# Altium PCB Power_Converter.PcbDoc
Units mil, origin at the board's own origin, x right, y up, seen from the top; angles counter-clockwise.
Board outline 3100 x 2215 mil, 2 copper layers (Top Layer, Bottom Layer), stack 21 mil thick; 23 components, 10 nets, 55 pads, 7 vias.
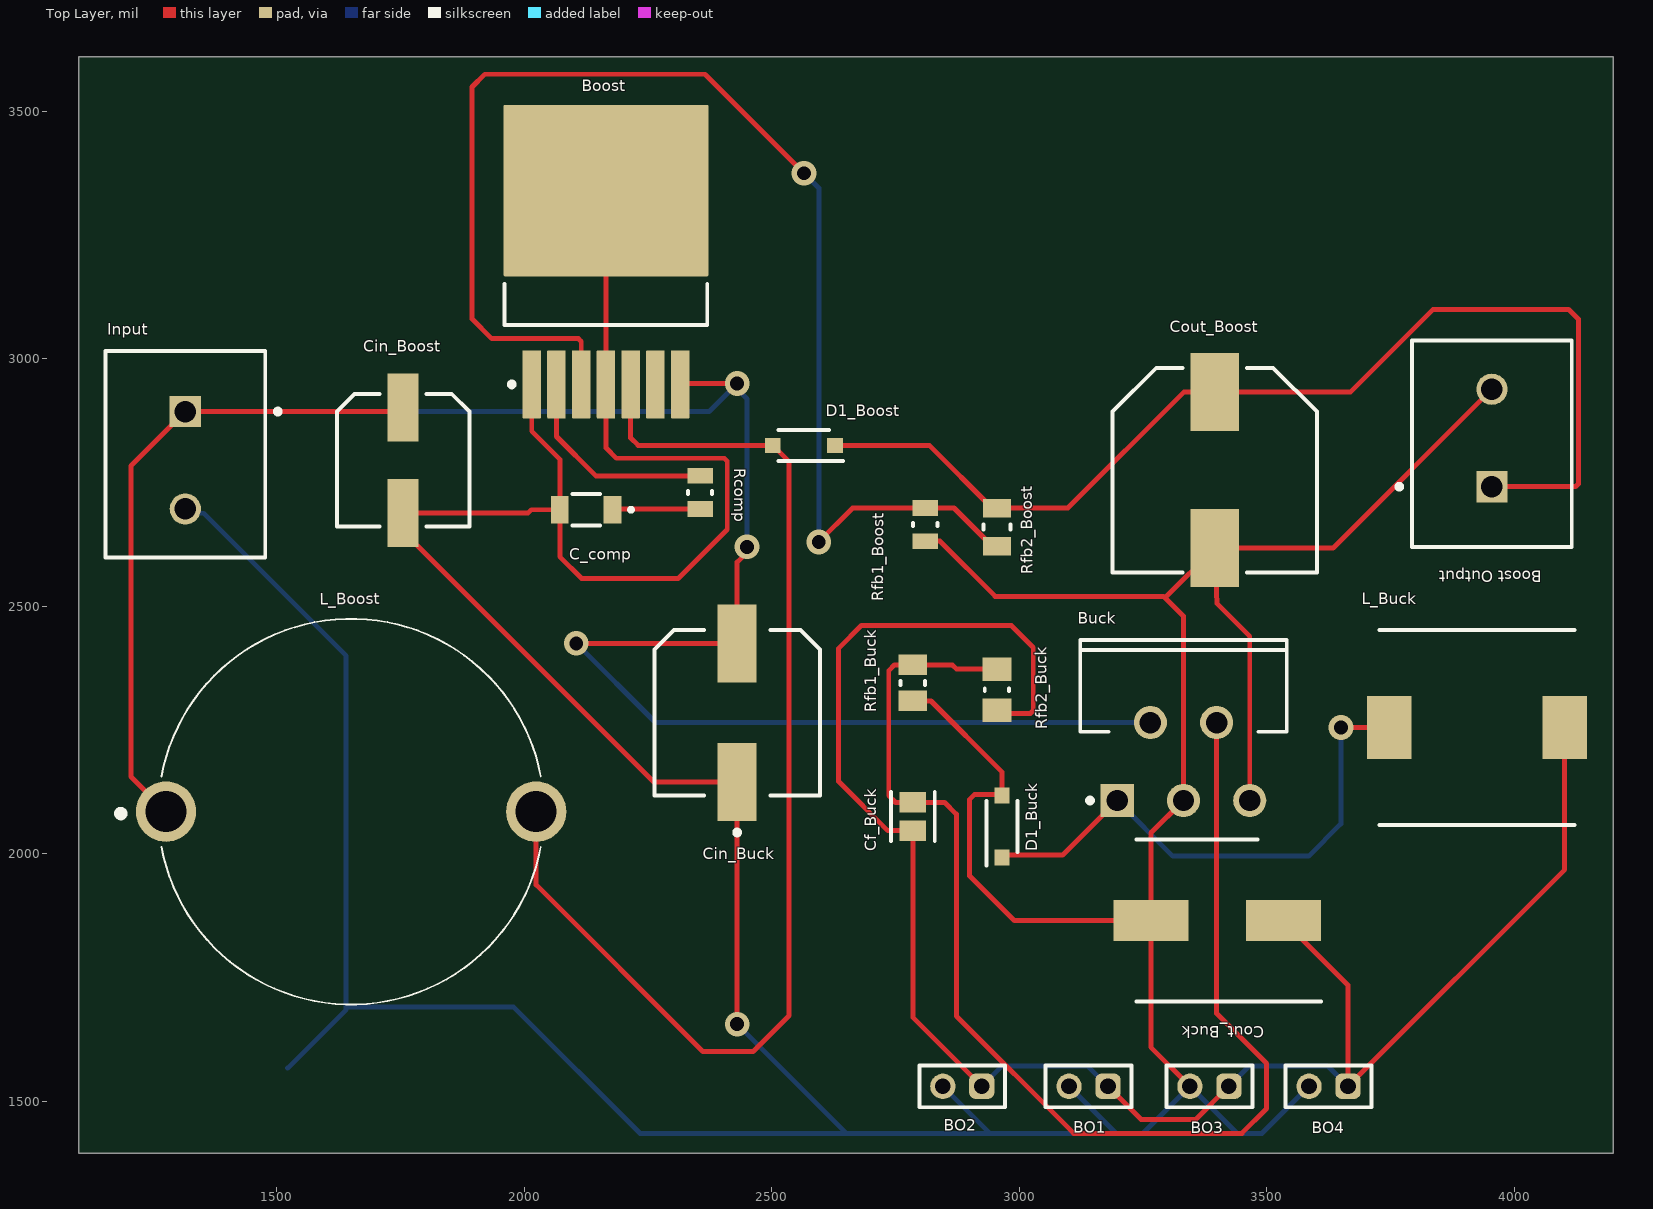
[diagram p0: Top Layer view]
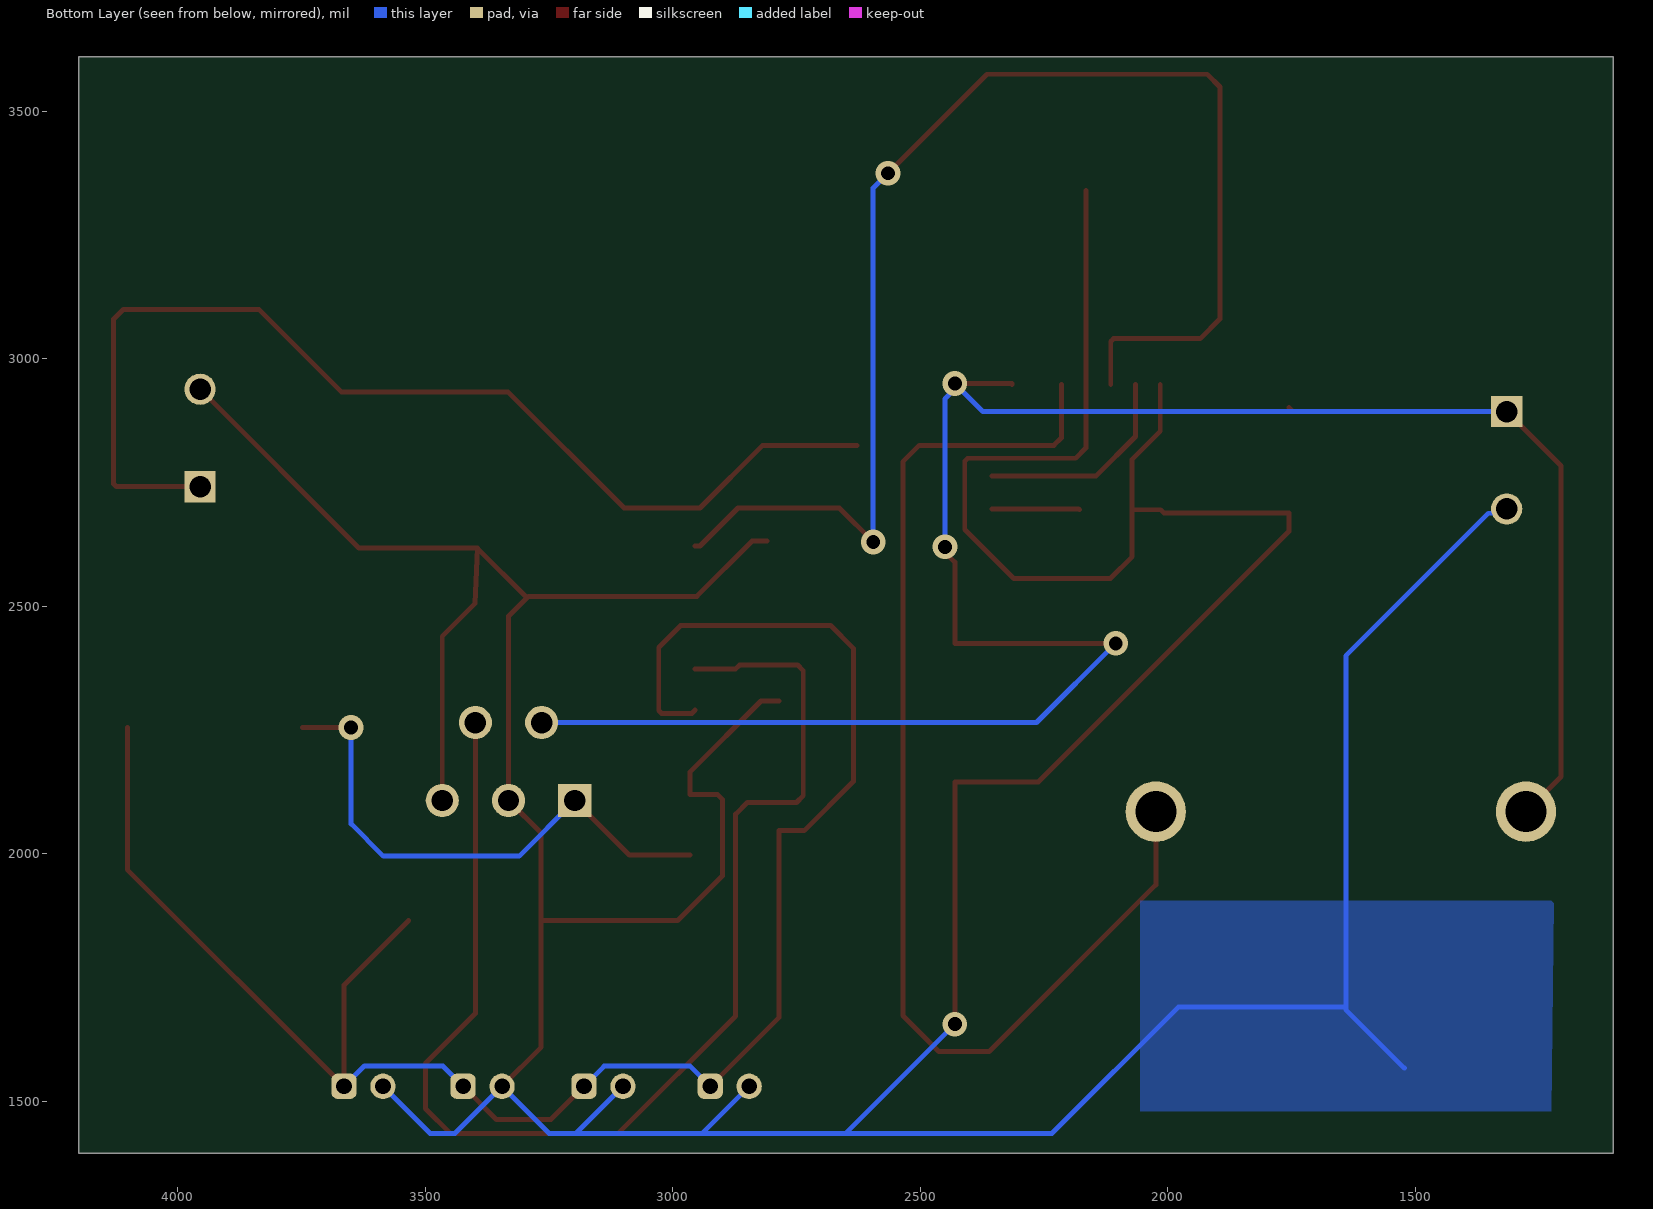
[diagram p1: Bottom Layer view, seen from below]
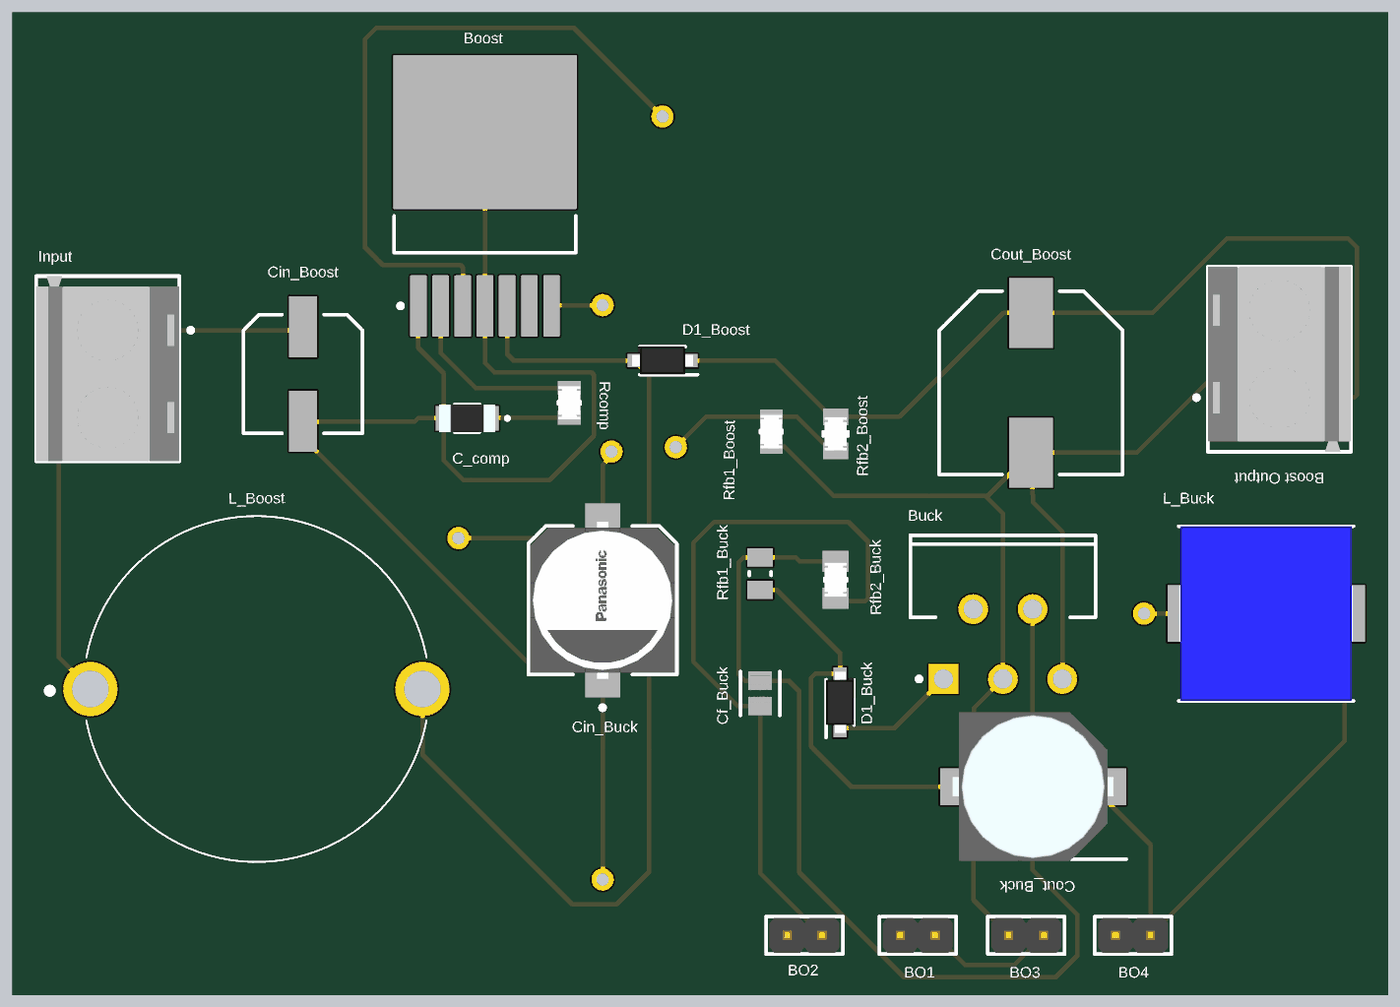
[diagram p2: 3D render of the assembled board from above, using the file's embedded part models]

## Layer stack, top to bottom
Top Solder: solder mask 0.4, Solder Resist, Dk 3.5
Top Layer: signal copper 1.4
Dielectric 2: prepreg 2.8, PP-006, Dk 4.1
Dielectric 1: dielectric 12.6, FR-4, Dk 4.8
Dielectric 3: prepreg 2.8, PP-006, Dk 4.1
Bottom Layer: signal copper 1.4
Bottom Solder: solder mask 0.4, Solder Resist, Dk 3.5

## Board outline
1100,1395 4200,1395 4200,3610 1100,3610

## Design rules (kind name [scope] priority, off if disabled: settings)
Clearance [All] p1: gap=10 ignorepadtopadclearanceinfootprint=FALSE except(0: Arc-Hole Track-Hole SMDPad-Hole THPad-Hole Via-Hole Fill-Hole Poly-Hole Region-Hole Text-Hole)
PolygonConnect [All] p1: connectstyle=Relief reliefconductorwidth=10 reliefentries=4 polygonreliefangle="90 Angle" airgapwidth=10
RoutingVias [All] p1: holewidth=28 width=50 viastyle="Through Hole" minholewidth=28 minwidth=50 maxholewidth=28 maxwidth=50
SolderMaskExpansion [All] p1: expansion=4 istentingtop=FALSE
Width [All] p1: maxlimit=10 minlimit=10 preferedwidth=10
30 further rules are at their usual default settings.

## Classes and differential pairs
component class "Power_Converter Circuit": r

## Components (designator, comment, footprint, x,y, rotation, side; value= is the part's Value field where it differs from the comment)
BO1 "62000211121" 62000211121 3140,1530 r180 top
BO2 "62000211121" 62000211121 2885,1530 r180 top
BO3 "62000211121" 62000211121 3384.37,1530 r180 top
BO4 "62000211121" 62000211121 3625,1530 r180 top
Boost "LM2588S-ADJ/NOPB" KTW0007B_N 2165,3196.3 r90 top
"Boost Output" "282836-2" TECO-282836-2_V 3955,2840 r90 top
Buck "" NDH0005A 3331.93,2186.26 r0 top
C_comp "ECPU1C474MA5" ECPU1C154MA5 2125,2695 r180 top (schematic designator Ccomp_Boost)
Cf_Buck "CL21C222JBFNNNE" FP-CL21-IPC_C 2785,2075 r270 top
Cin_Boost "UUD1V680MCL1GS" NIC-CAPA2-6.3X7.7_V 1755,2795 r270 top
Cin_Buck "EEE-FK1H101GP" FP-FKF-MFG 2430,2285 r90 top
Cout_Boost "UUD1H221MNL1GS" NIC-CAPA2-10X10_V 3395,2775 r270 top
Cout_Buck "EMVH100ADA221MHA0G" CAPAE830X1050N 3400,1865 r180 top
D1_Boost "PMEG6010CEH,115" SODFL3516X120N 2565,2825 r180 top
D1_Buck "PMEG6010CEH,115" SODFL3516X120N 2965,2055 r90 top
Input "282836-2" TECO-282836-2_V 1315,2795 r270 top
L_Boost "1447440C" 1447440C 1650,2085 r0 top
L_Buck "SRU1048-331Y" INDPM100100X510N 3925,2255 r0 top
Rcomp "CRCW08052K37FKEA" FP-CRCW0805-e3-IPC_C 2355,2730 r270 top (schematic designator Rcomp_Boost)
Rfb1_Boost "CRCW08051K50FKEB" FP-CRCW0805-e3-IPC_C 2810,2665 r270 top
Rfb1_Buck "CRCW08051K00FKEA" RESC2013X50X30NL20T20 2785,2345 r90 top
Rfb2_Boost "CRCW080538K3FKEB" FP-CRCW0805-e3-MFG 2955,2660 r90 top
Rfb2_Buck "CRCW08051K69FKEA" FP-CRCW0805-e3-IPC_A 2955,2331.37 r270 top

## Footprints (in the part's own frame and the unit in brackets; to place one, negate y for a bottom-side part, rotate by r counter-clockwise, add the part's x,y. Pads: shape width x height; smd on the part's side, far side on the other; paste and mask are expansions set on the pad)
1447440C [mm]
  round 3.1 hole 2.1: 1(-9.5,0) 2(9.5,0)
  silkscreen extent -11.96,-9.9 9.73,9.9
62000211121 [mm] "Pin Header, pitch 2.00 mm, THT, Vertical, single row, 2p"
  rrect50% 1.3x1.3 hole 0.8: 1(-1,0)
  round 1.3 hole 0.8: 2(1,0)
  silkscreen extent -2.2,-1.07 2.2,1.07, body extent -2,-1 2,1, height 6.05
CAPAE830X1050N [mm]
  rect 3.85x2.1 smd: 1(-3.4,0) 2(3.4,0)
  silkscreen extent -5.33,-4.15 4.15,4.15, body extent -4.6,-4.25 4.6,4.25, height 10.5
ECPU1C154MA5 [mm]
  rect 0.9x1.4 smd: 1(-1.35,0) 2(1.35,0)
  silkscreen extent -2.4,-0.8 0.7,0.8, body extent -1.6,-0.8 1.6,0.8, height 1.4
FP-CL21-IPC_C [mil]
  rect 41.52x53.39 smd paste+0 mask+0: 1(-28.57,0) 2(28.57,0)
  silkscreen extent -49,-44 49,44, body extent -53,-32 53,32, height 10
FP-CRCW0805-e3-IPC_A [mil]
  rect 47.5x59.38 smd paste+0 mask+0: 1(-41.37,0) 2(41.37,0)
  silkscreen extent -3,-25 3,25, body extent -85,-49 85,49, height 10
FP-CRCW0805-e3-IPC_C [mil]
  rect 31.75x51.5 smd paste+0 mask+0: 1(-33.5,0) 2(33.5,0)
  silkscreen extent -3,-25 3,25, body extent -53,-31 53,31, height 10
FP-CRCW0805-e3-MFG [mm]
  rect 0.95x1.45 smd paste+0 mask+0: 1(-0.975,0) 2(0.975,0)
  silkscreen extent -0.13,-0.7 0.13,0.7, body extent -1.55,-0.82 1.55,0.82, height 0.25
FP-FKF-MFG [mm]
  rect 4x2 smd paste+0 mask+0: 1(-3.55,0) 2(3.55,0)
  silkscreen extent -6.27,-4.25 4.25,4.25, body extent -5.8,-4.5 5.8,4.5, height 0.25
INDPM100100X510N [mm]
  rect 2.3x3.25 smd: 1(-4.5,0) 2(4.5,0)
  silkscreen extent -5,-5 5,5, body extent -5,-5 5,5, height 5.1
KTW0007B_N [mm] "DPAK, 7-Leads, Body 9.4x10.4mm, Pitch 1.27mm, IPC Medium Density"
  rrect11% 3.5x0.95 smd: 1(-6.3,3.81) 2(-6.3,2.54) 3(-6.3,1.27) 4(-6.3,0) 5(-6.3,-1.27) 6(-6.3,-2.54) 7(-6.3,-3.81)
  rrect1% 8.8x10.5 smd: 8(3.65,0)
  silkscreen extent -6.42,-5.2 -1.15,5.2, body extent -3.25,-5.2 6.15,5.2, height 4.65
NDH0005A [mm] "FM, 5-Leads, Body 10.6x4.7mm, Pitch 1.7mm"
  rect 1.7x1.7 hole 1.1: 1(-3.4,-2)
  round 1.7 hole 1.1: 2(-1.7,2) 3(0,-2) 4(1.7,2) 5(3.4,-2)
  silkscreen extent -5.3,-2.12 5.3,6.23, body extent -5.35,-2.31 5.35,6.28, height 21.1
NIC-CAPA2-6.3X7.7_V [mm] "Aluminum Electrolytic Capacitor, Diameter 6.3mm, Height 8mm, Pitch 5.4mm"
  rect 3.5x1.6 smd: 1(-2.7,0) 2(2.7,0)
  silkscreen extent -3.4,-3.4 3.4,3.4, body extent -3.14,-3.12 3.14,3.15, height 8
NIC-CAPA2-10X10_V [mm] "Aluminum Electrolytic Capacitor, Diameter 10mm, Height 10.8mm, Pitch 8mm"
  rect 4x2.5 smd: 1(-4,0) 2(4,0)
  silkscreen extent -5.25,-5.25 5.25,5.25, body extent -4.96,-4.99 5,4.99, height 10.8
RESC2013X50X30NL20T20 [mm] "Chip Resistor, 2-Leads, Body 2.00x1.25mm, IPC Medium Density"
  rect 1.05x1.45 smd: 1(-0.925,0) 2(0.925,0)
  silkscreen extent -0.1,-0.62 0.1,0.62, body extent -1.1,-0.72 1.1,0.72, height 0.5
SODFL3516X120N [mm]
  rect 0.82x0.76 smd: 1(-1.6,0) 2(1.6,0)
  silkscreen extent -2.01,-0.8 1.3,0.8, body extent -1.75,-0.8 1.75,0.8, height 1.1
TECO-282836-2_V [mm] "Female Header, Pitch 5mm, 1 x 2 Position, Height 10mm"
  rect 1.6x1.6 hole 1.1: 1(-2.5,0)
  round 1.6 hole 1.1: 2(2.5,0)
  silkscreen extent -5.6,-4.1 5,4.87, body extent -5.6,-4.1 5,4.1, height 10

## Part data
BO1 BO2 BO3 BO4: library part CMP-1502-00956-3, Contact Resistance=20mΩ, Current Rating=2A, Max Operating Temperature=105°C, Min Operating Temperature=-40°C, Operating Supply Voltage=200V, Contact Material=Gold, Gender=Male, Height=6.35mm, Lead Pitch=2mm, NexarPartId=61924778, Number of Contacts=2, Number of Pins=2, Number of Rows=1, Orientation=Vertical, RoHS=Non-Compliant, Voltage Rating=200V
Boost: library part CMP-0069-00054-3, "SIMPLE SWITCHER® 5A Flyback Regulator with Shutdown, 7-pin TO-263, Pb-Free", Manufacturer="Texas Instruments", PackageTopMarking="NSUZXYTTE#*LM2588S*-ADJ P+", PowerWise=N, Code_JEDEC=MO-169-AC, ComponentLink1Description="Datasheet URL", ComponentLink1URL=http://www.ti.com/general/docs/lit/getliterature.tsp?genericPartNumber=LM2588&fileType=pdf, CompType=Switcher, PackageDescription="TO-263, Molded, .400 x .390 x .180in Body, 7 Lead, .050in Pitch, Surface Mount", PackageReference=KTW0007B, PinCount=7, RoHS=Y
"Boost Output" Input: library part CMP-1684-00017-1, "Female Header, Pitch 5 mm, 1 x 2 Position, Height 10 mm, Tail Length 3.5 mm, Rohs, Bulk", Color=Green, Current=13.5A, Manufacturer="TE Connectivity", Package Description="Female Header, Pitch 5 mm, 1 x 2 Position, Height 10 mm, Tail Length 3.5 mm", Package Reference=THD, Standard Package=300, Voltage=300V, 3D Model=282836-2.pdf, Category=Connectors,Interconnects, Clamp Material - Plating=Brass-NickelPlated, Contact Material - Plating=Brass-TinPlated, Datasheet URL=http://www.te.com.cn/commerce/DocumentDelivery/DDEController?Action=showdoc&DocId=Catalog+Section%7F1308389_EUROSTYLE_TERMINAL_BLOCKS%7F0607%7Fpdf%7FEnglish%7FENG_CS_1308389_EUROSTYLE_TERMINAL_BLOCKS_0607.pdf%7F282836-2, Dynamic Catalog=BuchananSeries, Family=TerminalBlocks-WiretoBoard, Featured Product=EurostyleTerminalBlockConnectors, Features=Interlocking(Side), Housing Material=Polyamide(PA66),Nylon6/6, Manufacturer URL=http://www.te.com, Mating Orientation=HorizontalwithBoard, Mounting Type=ThroughHole, Number of Levels=1, Other Names="5ULV-02B / A98076", Packaging=Bulk, Pitch="0.197\"(5.00mm)", Positions Per Level=2, Product Training Modules=Wire-to-BoardEurostyleTerminalBlocks, RoHS Information=282836-2StatementofCompliance, Screw Material - Plating=Brass-NickelPlated, Screw Thread=M3, Series=Buchanan, Torque - Screw=0.68Nm(6Lb-In), Wire Gauge=16-30AWG, Wire Termination=Screw-RisingCageClamp
Buck: library part CMP-0069-01920-3, "SIMPLE SWITCHER® Power Converter 150 KHz 1A Step-Down Voltage Regulator, 5-pin TO-220, Pb-Free", Manufacturer="Texas Instruments", PackageTopMarking="NSUZXYTTE#*LM2595T*-ADJ P+", PowerWise=N, ComponentLink1Description="Datasheet URL", ComponentLink1URL=http://www.ti.com/general/docs/lit/getliterature.tsp?genericPartNumber=LM2595&fileType=pdf, CompType=Switcher, PackageDescription="TO-220, Molded, Stagger Bend, 5 Lead", PackageReference=NDH0005A, PinCount=5, RoHS=Y
C_comp: "Capacitor", Manufacturer_Name=Panasonic, Datasheet Link=http://industrial.panasonic.com/cdbs/www-data/pdf/RDI0000/ABD0000C178.pdf, Manufacturer_Part_Number=ECPU1C474MA5
Cf_Buck: library part CMP-13271-001564-1, "CL21 Series 0805 2.2nF 50V ±5% Tolerance C0G Multilayer Ceramic Chip Capacitor", Capacitance=2.2nF, Case Code (Imperial)=0805, Case Code (Metric)=2012, Dielectric=C0G, Max Operating Temperature=125°C, Min Operating Temperature=-55°C, Package Quantity=2000, Tolerance=5%, Voltage=50V, Case/Package=0805, Depth=1.25mm, Height=1.25mm, Lead Free="Lead Free", Length=2mm, Mount="Surface Mount", Packaging="Tape and Reel", Radiation Hardening=No, Thickness=0.053inch, Voltage Rating=50V, Voltage Rating (DC)=50V, Width=0.049inch
Cin_Boost: library part CMP-0687-00064-1, "Aluminum Electrolytic Capacitor, UD Series, Low Impedance, 68 uF, 35 V, + / - 20%, -55 to 105 degC, Chip Type, 6.3 x 7.7 mm D x L, Pb-Free, Reel", Manufacturer=Nichicon, Rated Capacitance="68 uF", Rated Ripple Current (at 100kHz)="280 mA", Rated Voltage="35 V", Tolerance Rated Capacitance="-20 to 20%", ComponentLink1Description="Manufacturer URL", ComponentLink1URL=http://www.nichicon.co.jp/, ComponentLink2Description=Datasheet, ComponentLink2URL=http://products.nichicon.co.jp/en/pdf/XJA043/e-ud.pdf, ComponentLink3Description="Package Specification", ComponentLink3URL=http://products.nichicon.co.jp/en/pdf/XJA043/e-ud.pdf, DatasheetVersion=08/2012, Diameter="6.3 mm", Endurance Time="2000 h", Impedance="0.34 Ohm", Length="7.7 mm", Mounting Technology="Surface Mount", PackageDescription="2-Pin Surface Mount Device, Diameter 6.3 mm, Height 7.7 mm, Pitch 5.4 mm", PackageReference=CAPAE-D6.3H7.7, Packing="Dia382mm Reel", PartNumber=UUD1V680MCL1GS, RoHS=TRUE
Cin_Buck: library part CMP-05427-000032-1, "CAP ALUM 100UF 20% 50V SMD", Capacitance=100uF, Case/Package=SMD/SMT, ESR (Equivalent Series Resistance)=340mR, Leakage Current=10mA, Max Operating Temperature=105°C, Min Operating Temperature=-55°C, Package Quantity=1, Ripple Current=350mA, Tolerance=20%, Voltage=50V, Construction=Cylindrical, Contact Plating=Tin, Diameter=8mm, Height=10.2mm, Height - Seated (Max)=0.402inch, Impedance=340mR, Lead Free="Lead Free", Length=10.2mm, Life (Hours)=5000Hour, Mount="Surface Mount", Number of Pins=2, Packaging="Tape and Reel", Radiation Hardening=No, REACH SVHC="No SVHC", Ripple Current (AC)=350mA, RoHS Compliant=Yes, Series=FK, Termination=SMD/SMT, Voltage Rating=50V, Voltage Rating (DC)=50V, Width=10mm
Cout_Boost: library part CMP-0687-00004-1, "Aluminum Electrolytic Capacitor, UD Series, Low Impedance, 220 uF, 50 V, + / - 20%, -55 to 105 degC, Chip Type, 10 x 10 mm D x L, Pb-Free, Reel", Manufacturer=Nichicon, Rated Capacitance="220 uF", Rated Ripple Current (at 100kHz)="670 mA", Rated Voltage="50 V", Tolerance Rated Capacitance="-20 to 20%", ComponentLink1Description="Manufacturer URL", ComponentLink1URL=http://www.nichicon.co.jp/, ComponentLink2Description=Datasheet, ComponentLink2URL=http://products.nichicon.co.jp/en/pdf/XJA043/e-ud.pdf, ComponentLink3Description="Package Specification", ComponentLink3URL=http://products.nichicon.co.jp/en/pdf/XJA043/e-ud.pdf, DatasheetVersion=08/2012, Diameter="10 mm", Endurance Time="5000 h", Impedance="0.18 Ohm", Length="10 mm", Mounting Technology="Surface Mount", PackageDescription="2-Pin Surface Mount Device, Diameter 10 mm, Height 10 mm, Pitch 8 mm", PackageReference=CAPAE-D10H10, Packing="Dia382mm Reel", PartNumber=UUD1H221MNL1GS, RoHS=TRUE
Cout_Buck: "Capacitor", Manufacturer_Name=Chemi-Con, Datasheet Link=https://www.mouser.com/datasheet/2/420/MVHRA_e-2509159.pdf, Height=10.5mm, Manufacturer_Part_Number=EMVH100ADA221MHA0G
D1_Boost D1_Buck: "Diode", Manufacturer_Name=Nexperia, Mouser Part Number=771-PMEG6010CEH-T/R, Arrow Part Number=PMEG6010CEH,115, Arrow Price/Stock=https://www.arrow.com/en/products/pmeg6010ceh115/nexperia?region=europe, Datasheet Link=https://assets.nexperia.com/documents/data-sheet/PMEG6010CEH_PMEG6010CEJ.pdf, Height=1.2mm, Manufacturer_Part_Number=PMEG6010CEH,115, Mouser Price/Stock=https://www.mouser.co.uk/ProductDetail/Nexperia/PMEG6010CEH115?qs=LOCUfHb8d9uyulDQGIpcOA%3D%3D
L_Boost: "Inductor", Manufacturer_Name="Murata Electronics", Mouser Part Number=580-1447440C, Arrow Part Number=1447440C, Arrow Price/Stock=https://www.arrow.com/en/products/1447440c/murata-power-solutions, Datasheet Link=https://www.arrow.com/en/products/1447440c/murata-power-solutions, Manufacturer_Part_Number=1447440C, Mouser Price/Stock=https://www.mouser.co.uk/ProductDetail/Murata-Power-Solutions/1447440C?qs=Gob89d8LFA9gyjWpYAyVrg%3D%3D
L_Buck: "Inductor", Manufacturer_Name=Bourns, Datasheet Link=http://uk.rs-online.com/web/p/products/1729735, Height=5.1mm, Manufacturer_Part_Number=SRU1048-331Y
Rcomp: library part CMP-1013-00550-3, "RES Thick Film, 2.37kΩ, 1%, 0.125W, 100ppm/°C, 0805", Case Code (Imperial)=0805, Case Code (Metric)=2012, Max Operating Temperature=155°C, Max Power Dissipation=125mW, Min Operating Temperature=-55°C, Package Quantity=10, Resistance=2.37kR, Temperature Coefficient=100ppm/°C, Tolerance=1%, Voltage Rating=150V, Case/Package=0805, Composition="Thick Film", Contact Plating=Tin, Depth=1.25mm, Features="Automotive AEC-Q200", Height=0.45mm, Length=2mm, Military Standard=Not, Number of Terminations=2, Packaging="Tape and Reel", Power Rating=125mW, Radiation Hardening=No, Termination=SMD/SMT, Weight=0.000194oz, Width=1.25mm
Rfb1_Boost: library part CMP-2001-04198-2, "RES Thick Film, 1.5kΩ, 1%, 0.125W, 100ppm/°C, 0805", Case Code (Imperial)=0805, Case Code (Metric)=2012, Max Operating Temperature=155°C, Max Power Dissipation=125mW, Min Operating Temperature=-55°C, Package Quantity=10000, Resistance=1.5kR, Temperature Coefficient=100ppm/°C, Tolerance=1%, Voltage Rating=150V, Case/Package=0805, Composition="Thick Film", Contact Plating=Tin, Features="Automotive AEC-Q200", Height=0.02inch, Lead Free="Lead Free", Length=0.079inch, Number of Terminations=2, Packaging="Tape and Reel", Power Rating=125mW, Radiation Hardening=No, Termination=SMD/SMT, Voltage Rating (DC)=150V, Weight=0.000194oz, Width=0.049inch
Rfb1_Buck: library part CMP-1013-00510-2, Manufacturer="Vishay Dale", Part Number=CRCW08051K00FKEA
Rfb2_Boost: library part CMP-02407-003221-1, "RES Thick Film, 38.3kΩ, 1%, 0.125W, 100ppm/°C, 0805", Case Code (Imperial)=0805, Case Code (Metric)=2012, Max Operating Temperature=155°C, Max Power Dissipation=125mW, Min Operating Temperature=-55°C, Package Quantity=10000, Resistance=38.3kR, Temperature Coefficient=100ppm/°C, Tolerance=1%, Voltage Rating=150V, Case/Package=0805, Composition="Thick Film", Features="Automotive AEC-Q200", Height=0.02inch, Lead Free="Lead Free", Length=0.079inch, Number of Terminations=2, Packaging="Tape and Reel", Power Rating=125mW, Termination=SMD/SMT, Weight=0.000194oz, Width=0.049inch
Rfb2_Buck: library part CMP-2001-03620-2, "RES Thick Film, 1.69kΩ, 1%, 0.125W, 100ppm/°C, 0805", Case Code (Imperial)=0805, Case Code (Metric)=2012, Max Operating Temperature=155°C, Max Power Dissipation=125mW, Min Operating Temperature=-55°C, Package Quantity=10, Resistance=1.69kR, Temperature Coefficient=100ppm/°C, Tolerance=1%, Voltage Rating=150V, Case/Package=0805, Composition="Thick Film", Contact Plating=Tin, Depth=1.25mm, Features="Automotive AEC-Q200", Height=0.45mm, Lead Free="Lead Free", Length=2mm, Military Standard=Not, Number of Terminations=2, Packaging="Tape and Reel", Power Rating=125mW, Radiation Hardening=No, Termination=SMD/SMT, Voltage Rating (DC)=150V, Weight=0.000194oz, Width=1.25mm

## Via types
v1: diameter 50, hole 28, Top Layer to Bottom Layer, 7 vias

## Nets (pads, with @x,y where several pads share a name; then routed paths per layer and width w, separated by ;. In a path a pad name is that pad's centre, name@x,y a point inside that pad or via, vN(x,y) a via of type N, cw(c..) or ccw(c..) an arc to the next point about the centre after c; other vN are vias at no path point)
GND: "Boost Output.2" BO1.2 BO2.2 BO3.2 BO4.2 Boost.1 Boost.4 Boost.8 Buck.3 Buck.5 C_comp.2 Cin_Boost.2 Cin_Buck.1 Cout_Boost.2 Cout_Buck.2 D1_Buck.2 Input.2 Rfb1_Boost.2 Rfb1_Buck.1 | length 11370.9
  Top Layer w10: Cin_Boost.2 Cin_Boost.2@1755,2688 ; Boost.1 2015,2853.85 2071.85,2797 C_comp.2 ; Boost.8 Boost.4 2165,2820 2186,2799 2404.14,2799 2410,2793.14 2410,2655 2311,2556 2115.85,2556 2071.85,2600 C_comp.2 ; v1(2430,1655.59) Cin_Buck.1 2261.06,2145.24 1755,2651.3 Cin_Boost.2@1755,2688 ; Rfb1_Buck.1 2821.73,2308.58 2965,2165.31 D1_Buck.2@2965,2122.99 ; Rfb1_Boost.2 2840,2631.5 2951.5,2520 3291.93,2520 3294.71,2517.23 ; D1_Buck.2@2965,2120 2910,2120 2900,2110 2900,1955 2990,1865 Cout_Buck.2@3266,1865 ; BO3.2 3266,1609 Cout_Buck.2@3266,1865 ; Buck.5 3465.79,2439.21 3400,2505 Cout_Boost.2 ; 3955,2938.43 3634.09,2617.52 Cout_Boost.2 ; Cin_Boost.2@1755,2688 2007,2688 2014,2695 C_comp.2 ; Cout_Buck.2@3266,1865 Cout_Buck.2 3266.14,2041.73 Buck.3 3331.93,2480 3294.71,2517.23 ; 3294.71,2517.23 Cout_Boost.2
  Bottom Layer w10: Input.2 1323.67,2687.91 1352.09,2687.91 1640,2400 1640,1685 1521.79,1566.79 ; 1640,1690 1978.62,1690 2233.62,1435 2650.59,1435 ; v1(2430,1655.59) 2650.59,1435 ; BO2.2 2940.63,1435 ; BO1.2 3195.63,1435 ; BO4.2 3490.63,1435 3440,1435 BO3.2 3250,1435 3195.63,1435 ; 2650.59,1435 2940.63,1435 ; 2940.63,1435 3195.63,1435
NetBO1_1: BO1.1 BO2.1 BO3.1 BO4.1 Cf_Buck.2 Cout_Buck.1 L_Buck.2 Rfb2_Buck.2 | length 3829.6
  Top Layer w10: BO2.1 2785,1669.37 Cf_Buck.2 2734.57,2046.43 2635,2146 2635,2415 2681,2461 2984,2461 3028.4,2416.6 3028.4,2289.26 3022.54,2283.4 2961.6,2283.4 Rfb2_Buck.2 ; BO1.1 3246.37,1463 3356.74,1463 BO3.1 ; Cout_Buck.1 3664.37,1734.49 BO4.1 4102.17,1967.8 L_Buck.2
  Bottom Layer w10: BO2.1 2964.96,1570.59 3138.78,1570.59 BO1.1 ; BO3.1 3464.74,1571 3623.37,1571 BO4.1
"NetBoost Output_1": "Boost Output.1" Cout_Boost.1 D1_Boost.1 Rfb2_Boost.2 | length 2239.1
  Top Layer w10: D1_Boost.1 2818.54,2825 2945.16,2698.39 Rfb2_Boost.2 3098.39,2698.39 3332.48,2932.48 Cout_Boost.1 3669,2932.48 3836.52,3100 4110,3100 4130,3080 4130,2747.43 4124.14,2741.58 3955,2741.58
NetBoost_2: Boost.2 Rcomp.1 | length 428.2
  Top Layer w10: Boost.2 2065,2843 2144.5,2763.5 Rcomp.1
NetBoost_3: Boost.3 Rfb1_Boost.1 Rfb2_Boost.1 | length 2736.8
  Top Layer w10: Boost.3 2115,3034.9 2109.14,3040.76 1934.24,3040.76 1894.24,3080.76 1894.24,3549.24 1920,3575 2365,3575 v1(2565,3375) ; v1(2595,2630) 2663.5,2698.5 2868.27,2698.5 2945.16,2621.61 Rfb2_Boost.1
  Bottom Layer w10: v1(2565,3375) 2595,3345 v1(2595,2630)
NetBoost_5: Boost.5 D1_Boost.2 L_Boost.2 | length 2396
  Top Layer w10: L_Boost.2 2024.02,1936.98 2361,1600 2462.01,1600 2535,1672.99 2535,2792.01 D1_Boost.2 2230,2825 2215,2840 Boost.5
NetBoost_7: Boost.7 Buck.2 Cin_Boost.1 Cin_Buck.2 Input.1 L_Boost.1 | length 4675
  Top Layer w10: L_Boost.1 1205,2155.98 1205,2783.43 Input.1 1747.13,2893.43 Cin_Boost.1 ; v1(2105,2425) 2429.76,2425 Cin_Buck.2 2430,2589.18 2450,2609.18 v1(2450,2620) ; Boost.7 2315,2950 v1(2430,2950)
  Bottom Layer w10: Input.1 2373.43,2893.43 v1(2430,2950) 2430,2939.18 2450,2919.18 v1(2450,2620) ; v1(2105,2425) 2265,2265 Buck.2
NetBuck_1: Buck.1 D1_Buck.1 L_Buck.1 | length 1097
  Top Layer w10: D1_Buck.1@2965,1997.01 3087.56,1997.01 Buck.1 ; v1(3650,2255) L_Buck.1
  Bottom Layer w10: Buck.1 3310.59,1995 3584.79,1995 3650,2060.21 v1(3650,2255)
NetBuck_4: Buck.4 Cf_Buck.1 Rfb1_Buck.2 Rfb2_Buck.1 | length 2607.5
  Top Layer w10: Rfb2_Buck.1 2873.67,2372.74 2865,2381.42 Rfb1_Buck.2 2747.84,2381.42 2736.43,2370 2736.43,2117.15 2750,2103.57 Cf_Buck.1 2849.43,2103.57 2873,2080 2873,1672 3110,1435 3450,1435 3500,1485 3500,1576 3398.86,1677.14 Buck.4
NetCcomp_Boost_1: C_comp.1 Rcomp.2 | length 177.5
  Top Layer w10: C_comp.1 2179.65,2696.5 Rcomp.2
pads on no net: Boost.6

## Polygon pours and split planes (outlines as drawn)
GND on Bottom Layer "GND_L02_P000" (solid, pour order 0): 1219.94,1904.94 1220,1905 2055,1905 2055,1480 1225,1480